# EAGLE board Theseus_PCB (EAGLE 9.7.0)
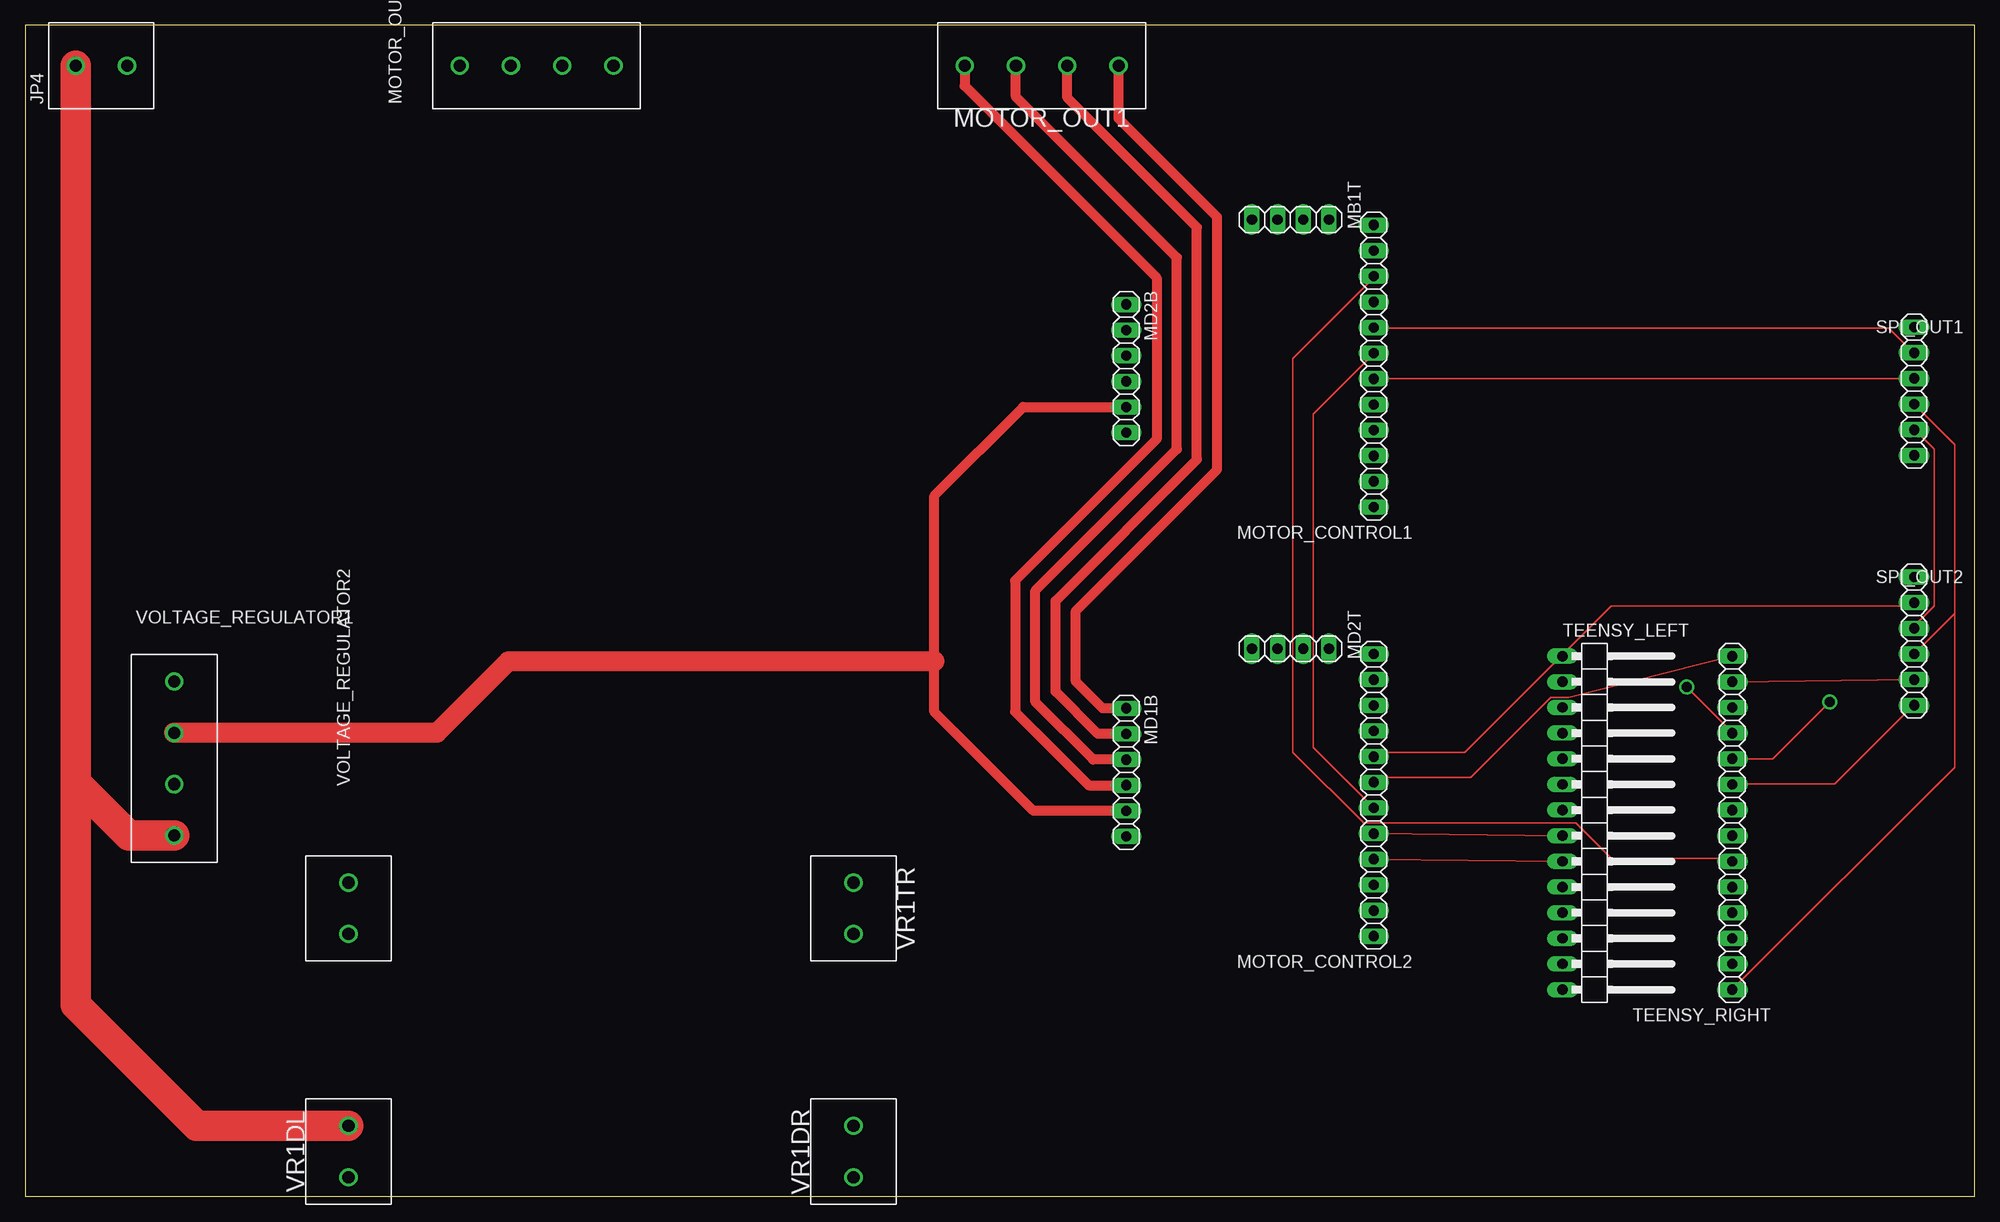
[diagram p0: board, top side]
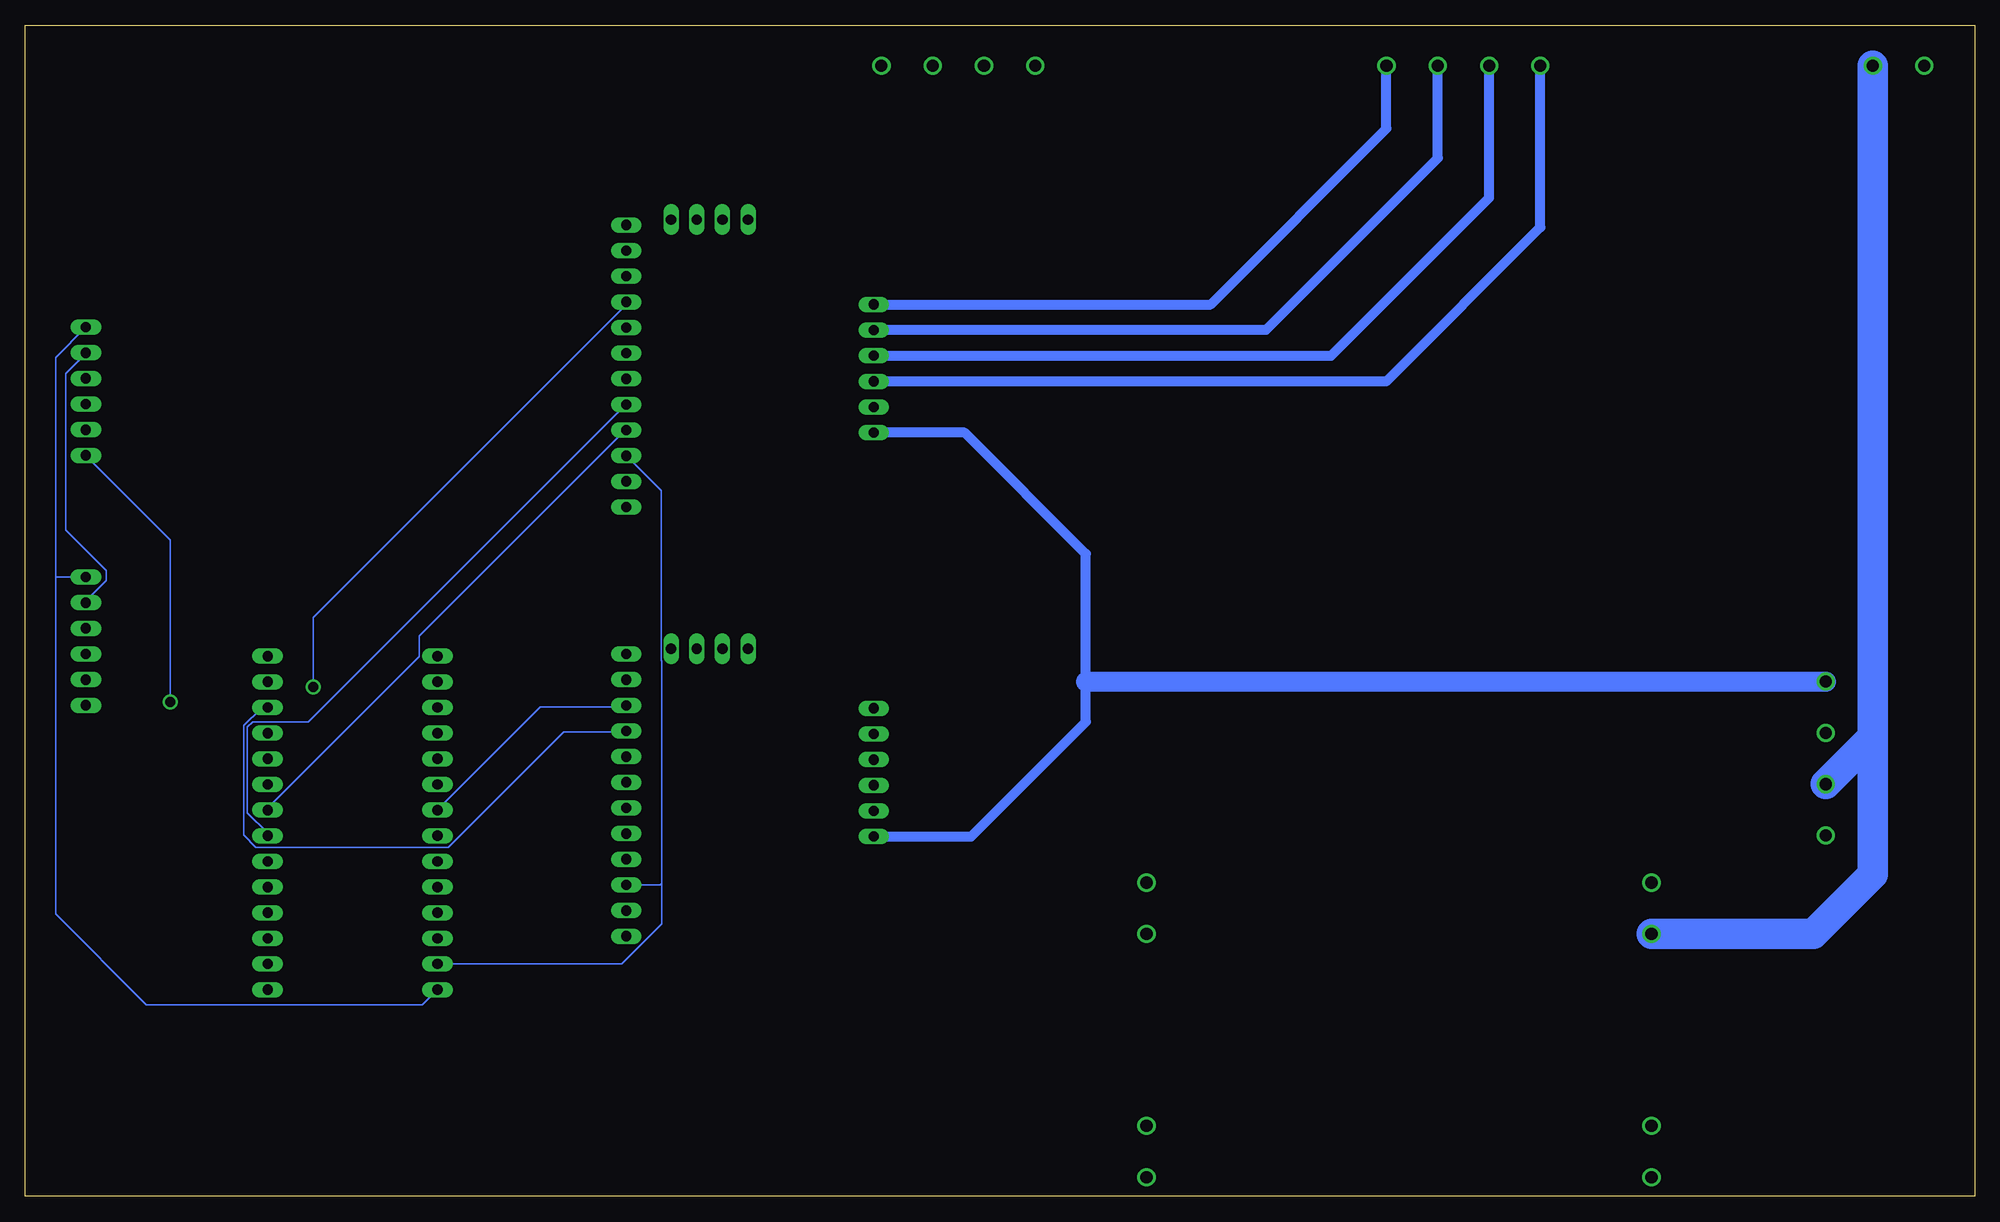
[diagram p1: board, bottom side, seen from below]

Size 193 x 116 mm. Coordinates in mm from the lower left corner, seen from the top.
Outline: 0,0 193,0 193,116 0,116 0,0
Copper layers (1*16): Top / Bottom
Stack-up Default Layer Stack: Top User Defined 0.035mm / Dielectric-1 User Defined 1.5mm / Bottom User Defined 0.035mm
Design rules: minimum copper width 6mil, minimum drill size 1mm, copper clearance wire_polygon to wire_polygon 6mil, copper clearance wire_polygon to pad_smd 6mil, copper clearance wire_polygon to via 6mil, copper clearance pad_smd to pad_smd 6mil, copper clearance pad_smd to via 6mil, copper clearance via to via 6mil, copper clearance smd to pad (same net) 6mil, copper clearance smd to via (same net) 6mil, copper clearance smd to smd (same net) 6mil, dimension clearance 40mil, restrict clearance 0mil, drill distance 6mil, keepout clearance 0mil

## Footprints (pad centres in the part's own frame; a part is rotated, then mirrored left to right if it is on the bottom)
TERMBLK_508-2N = drill 1.2: 1 0,0; 2 5.08,0
1X04 = drill 1.016 long: 1 -3.81,0; 2 -1.27,0; 3 1.27,0; 4 3.81,0
1X06 = drill 1.016 long: 1 -6.35,0; 2 -3.81,0; 3 -1.27,0; 4 1.27,0; 5 3.81,0; 6 6.35,0
1X12 = drill 1.016 long: 1 -13.97,0; 2 -11.43,0; 3 -8.89,0; 4 -6.35,0; 5 -3.81,0; 6 -1.27,0; 7 1.27,0; 8 3.81,0; 9 6.35,0; 10 8.89,0; 11 11.43,0; 12 13.97,0
TERMBLK_508-4N = drill 1.2: 1 0,0; 2 5.08,0; 3 10.16,0; 4 15.24,0
1X14/90 = drill 1.016 long: 1 -16.51,-3.81; 2 -13.97,-3.81; 3 -11.43,-3.81; 4 -8.89,-3.81; 5 -6.35,-3.81; 6 -3.81,-3.81; 7 -1.27,-3.81; 8 1.27,-3.81; 9 3.81,-3.81; 10 6.35,-3.81; 11 8.89,-3.81; 12 11.43,-3.81; 13 13.97,-3.81; 14 16.51,-3.81
1X14 = drill 1.016 long: 1 -16.51,0; 2 -13.97,0; 3 -11.43,0; 4 -8.89,0; 5 -6.35,0; 6 -3.81,0; 7 -1.27,0; 8 1.27,0; 9 3.81,0; 10 6.35,0; 11 8.89,0; 12 11.43,0; 13 13.97,0; 14 16.51,0

## Placement (x,y rotation side)
JP4  2828XX-2282837-2  [TERMBLK_508-2N]  5,112 0 top
MB1T  PINHD-1X4  [1X04]  125.25,96.75 180 top
MD1B  PINHD-1X6  [1X06]  109,42 270 top
MD2B  PINHD-1X6  [1X06]  109,82 270 top
MD2T  PINHD-1X4  [1X04]  125.25,54.25 180 top
MOTOR_CONTROL1  PINHD-1X12  [1X12]  133.5,82.25 90 top
MOTOR_CONTROL2  PINHD-1X12  [1X12]  133.5,39.75 90 top
MOTOR_OUT1  2828XX-4282837-4  [TERMBLK_508-4N]  93,112 0 top
MOTOR_OUT2  2828XX-4282837-4  [TERMBLK_508-4N]  43,112 0 top
SPI_OUT1  PINHD-1X4  [1X06]  187,79.75 270 top
SPI_OUT2  PINHD-1X4  [1X06]  187,55 270 top
TEENSY_LEFT  PINHD-1X14/90  [1X14/90]  156,37 270 top
TEENSY_RIGHT  PINHD-1X14  [1X14]  169,37 90 top
VOLTAGE_REGULATOR1  2828XX-4282837-4  [TERMBLK_508-4N]  14.75,51 270 top
VOLTAGE_REGULATOR2  2828XX-2282837-2  [TERMBLK_508-2N]  32,26 90 top
VR1DL  2828XX-2282837-2  [TERMBLK_508-2N]  32,7 270 top
VR1DR  2828XX-2282837-2  [TERMBLK_508-2N]  82,7 270 top
VR1TR  2828XX-2282837-2  [TERMBLK_508-2N]  82,26 90 top

## Library data of the parts
JP4 VOLTAGE_REGULATOR2 VR1DL VR1DR VR1TR = Connector; CATEGORY: Fixed Terminal Blocks; DESCRIPTION: Fixed Terminal Blocks 5.08MM PCB MOUNT 2P; MANUFACTURER: TE Connectivity AMP Connectors; MPN: 282837-2; OPERATING_TEMPERATURE: -40°C to +105°C; PART_STATUS: ACTIVE; PITCH: 0.200" (5.08mm); ROHS_COMPLIANCE: RoHS Compliant; SERIES: Buchanan; SUBCATEGORY: Terminal Blocks; TYPE: Through Hole; Screw - Rising Cage Clamp; Side wire entry, Horizontal with Board
MB1T MD2T = Connector; CATEGORY: Headers; DESCRIPTION: Header, Straight, 4 Position; MANUFACTURER: Generic; MPN: Generic; OPERATING_TEMPERATURE: Generic; PART_STATUS: Active; PITCH: 0.100" (2.54mm); ROHS_COMPLIANCE: Generic; SERIES: Generic; SUB-CATEGORY: Headers, Male Pins; TYPE: Board to Board or Cable, Unshrouded, Through Hole, Straight
MD1B MD2B SPI_OUT1 SPI_OUT2 = Connector; CATEGORY: Headers; DESCRIPTION: Header, Straight, 6 Position; MANUFACTURER: Generic; MPN: Generic; OPERATING_TEMPERATURE: Generic; PART_STATUS: Active; PITCH: 0.100" (2.54mm); ROHS_COMPLIANCE: Generic; SERIES: Generic; SUB-CATEGORY: Headers, Male Pins; TYPE: Board to Board or Cable, Unshrouded, Through Hole, Straight
MOTOR_CONTROL1 MOTOR_CONTROL2 = Connector; CATEGORY: Headers; DESCRIPTION: Header, Straight, 12 Position; MANUFACTURER: Generic; MPN: Generic; OPERATING_TEMPERATURE: Generic; PART_STATUS: Active; PITCH: 0.100" (2.54mm); ROHS_COMPLIANCE: Generic; SERIES: Generic; SUB-CATEGORY: Headers, Male Pins; TYPE: Board to Board or Cable, Unshrouded, Through Hole, Straight
MOTOR_OUT1 MOTOR_OUT2 VOLTAGE_REGULATOR1 = Connector; CATEGORY: Fixed Terminal Blocks; DESCRIPTION: Fixed Terminal Blocks 5.08MM PCB MOUNT 4P; MANUFACTURER: TE Connectivity AMP Connectors; MPN: 282837-4; OPERATING_TEMPERATURE: -40°C ~ 105°C; PART_STATUS: Active; PITCH: 0.200" (5.08mm); ROHS_COMPLIANCE: RoHS Compliant; SERIES: Buchanan; SUBCATEGORY: Terminal Blocks; TYPE: Through Hole; Screw - Rising Cage Clamp; Side wire entry, Horizontal with Board
TEENSY_LEFT = Connector; CATEGORY: Headers; DESCRIPTION: Header, Right Angle, 14 Position; MANUFACTURER: Generic; MPN: Generic; OPERATING_TEMPERATURE: Generic; PART_STATUS: Active; PITCH: 0.100" (2.54mm); ROHS_COMPLIANCE: Generic; SERIES: Generic; SUB-CATEGORY: Headers, Male Pins; TYPE: Board to Board or Cable, Unshrouded, Through Hole, Right Angle
TEENSY_RIGHT = Connector; CATEGORY: Headers; DESCRIPTION: Header, Straight, 14 Position; MANUFACTURER: Generic; MPN: Generic; OPERATING_TEMPERATURE: Generic; PART_STATUS: Active; PITCH: 0.100" (2.54mm); ROHS_COMPLIANCE: Generic; SERIES: Generic; SUB-CATEGORY: Headers, Male Pins; TYPE: Board to Board or Cable, Unshrouded, Through Hole, Straight

## Nets
MD2B: MD2B.4 MOTOR_OUT2.1
N$1: SPI_OUT1.5 SPI_OUT2.3
N$2: MOTOR_CONTROL1.10 TEENSY_RIGHT.6
N$3: JP4.1 VOLTAGE_REGULATOR1.4 VR1DL.1
N$4: JP4.2 VOLTAGE_REGULATOR1.3 VOLTAGE_REGULATOR2.1
N$5: MOTOR_CONTROL1.5 TEENSY_RIGHT.7
N$6: SPI_OUT2.6 TEENSY_RIGHT.9
N$7: MOTOR_CONTROL1.6 SPI_OUT1.3
N$8: MOTOR_CONTROL1.4 TEENSY_RIGHT.8
N$9: MOTOR_CONTROL2.10 TEENSY_LEFT.7
N$10: MOTOR_CONTROL1.7 MOTOR_CONTROL2.6
N$11: MOTOR_CONTROL1.8 MOTOR_CONTROL2.8 SPI_OUT1.2 SPI_OUT2.2 TEENSY_LEFT.1
N$12: MOTOR_CONTROL2.5 TEENSY_LEFT.8
N$13: MOTOR_CONTROL2.4 TEENSY_LEFT.9
N$14: MOTOR_CONTROL1.3 MOTOR_CONTROL2.3 TEENSY_LEFT.13
N$15: MD1B.5 MD2B.5 VOLTAGE_REGULATOR1.2
N$16: MD1B.6 MD2B.6 VOLTAGE_REGULATOR1.1
N$17: MOTOR_CONTROL2.7 TEENSY_RIGHT.14
N$18: MD2B.1 MOTOR_OUT2.4
N$19: MD2B.2 MOTOR_OUT2.3
N$20: MD2B.3 MOTOR_OUT2.2
N$21: SPI_OUT2.5 TEENSY_RIGHT.13
N$22: MD1B.1 MOTOR_OUT1.4
N$23: SPI_OUT1.4 SPI_OUT2.4 TEENSY_RIGHT.1
N$24: MD1B.3 MOTOR_OUT1.2
N$25: MD1B.4 MOTOR_OUT1.1
N$26: SPI_OUT1.1 SPI_OUT2.1 TEENSY_LEFT.14
N$27: SPI_OUT1.6 TEENSY_RIGHT.10
N$28: MOTOR_CONTROL1.9 TEENSY_RIGHT.11
N$29: MOTOR_CONTROL2.9 TEENSY_RIGHT.12
POWER_GROUND: MD1B.2 MOTOR_OUT1.3

## Tracks (layer width: path | path; a pad name or v marks a point on that pad's centre or on a via)
MD2B
  Bottom 1: MD2B.4 58.27,80.73 43,96 MOTOR_OUT2.1
N$1
  Top 0.152: SPI_OUT2.3 187,56.5 189,58.5 189,74 187,76 SPI_OUT1.5
N$2
  Top 0.152: TEENSY_RIGHT.6 169,33.5 157,33.5 153.5,37 132.5,37 125.5,44 125.5,83 133.5,91 MOTOR_CONTROL1.10
N$3
  Top 3: JP4.1 5,41 | 5,41 5,19 17,7 VR1DL.1 | VOLTAGE_REGULATOR1.4 10.24,35.76 5,41
N$4
  Bottom 3: JP4.2 10.08,45.51 | 10.08,45.51 VOLTAGE_REGULATOR1.3 | 10.08,45.51 10.08,31.92 16,26 VOLTAGE_REGULATOR2.1
N$5
  Bottom 0.152: TEENSY_RIGHT.7 169,36 171,38 171,46.5 170.5,47 165,47 133.5,78.5 MOTOR_CONTROL1.5
N$6
  Top 0.152: TEENSY_RIGHT.9 169.09,40.84 179.15,40.84 186.93,48.61 SPI_OUT2.6
N$7
  Top 0.152: SPI_OUT1.3 MOTOR_CONTROL1.6
N$8
  Bottom 0.152: TEENSY_RIGHT.8 169,38.5 154,53.5 154,55.5 133.5,76 MOTOR_CONTROL1.4
N$9
  Bottom 0.152: MOTOR_CONTROL2.10 133.5,48.5 142,48.5 152,38.5 TEENSY_LEFT.7
N$10
  Top 0.152: MOTOR_CONTROL2.6 133.5,38.5 127.51,44.49 127.51,77.51 133.5,83.5 MOTOR_CONTROL1.7
N$11
  Top 0.152: MOTOR_CONTROL1.8 133.5,86 184.5,86 187,83.5 SPI_OUT1.2 | MOTOR_CONTROL2.8 133.5,44 142.5,44 152,53.5 TEENSY_LEFT.1 152.5,54 157,58.5 187,58.5 SPI_OUT2.2
  Bottom 0.152: SPI_OUT1.2 187,83.5 189,81.5 189,66 185,62 185,61 187,59 SPI_OUT2.2
N$12
  Top 0.152: MOTOR_CONTROL2.5 TEENSY_LEFT.8
N$13
  Top 0.152: MOTOR_CONTROL2.4 TEENSY_LEFT.9
N$14
  Bottom 0.152: TEENSY_LEFT.13 133.97,23.03 130,27 130,31 | 130,31 130,53.03 130.05,53.08 130.05,69.91 MOTOR_CONTROL1.3 | MOTOR_CONTROL2.3 130.14,30.86 130,31
N$15
  Top 1: MD1B.5 99.81,38.19 90,48 90,53 90,69.41 98.78,78.19 MD2B.5
  Top 2: VOLTAGE_REGULATOR1.2 40.75,45.92 47.83,53 90,53
N$16
  Bottom 1: MD1B.6 99.35,35.65 88,47 88,51 88,63.65 100,75.65 MD2B.6
  Bottom 2: 88,51 VOLTAGE_REGULATOR1.1
N$17
  Top 0.152: MOTOR_CONTROL2.7 133.5,41.5 143.1,41.5 151.02,49.42 152.8,49.42 TEENSY_RIGHT.14
N$18
  Bottom 1: MD2B.1 75.65,88.35 58.24,105.76 MOTOR_OUT2.4
N$19
  Bottom 1: MD2B.2 70.19,85.81 53.16,102.84 MOTOR_OUT2.3
N$20
  Bottom 1: MD2B.3 63.73,83.27 48.08,98.92 MOTOR_OUT2.2
N$21
  Top 0.152: SPI_OUT2.5 TEENSY_RIGHT.13
N$22
  Top 1: MD1B.1 106.65,48.35 104,51 104,58 118,72 118,97 108.24,106.76 MOTOR_OUT1.4
N$23
  Top 0.152: SPI_OUT1.4 191,74.48 191,57.73 | 191,57.73 SPI_OUT2.4 | 191,57.73 191,42.5 TEENSY_RIGHT.1
N$24
  Top 1: MD1B.3 105.73,43.27 100,49 100,60 114,74 114,93 98.08,108.92 MOTOR_OUT1.2
N$25
  Top 1: MD1B.4 105.27,40.73 98,48 98,61 112,75 112,91 93,110 MOTOR_OUT1.1
N$26
  Bottom 0.152: TEENSY_LEFT.14 153.68,19 181,19 190,28 190,61.35 | 190,61.35 190,83.1 SPI_OUT1.1 | 190,61.35 SPI_OUT2.1
N$27  (via drill 1)
  Top 0.152: v178.65,48.98 173.01,43.35 TEENSY_RIGHT.10
  Bottom 0.152: v178.65,48.98 178.65,65.03 186.93,73.3 SPI_OUT1.6
N$28  (via drill 1)
  Top 0.152: v164.5,50.46 168.94,46.02 TEENSY_RIGHT.11
  Bottom 0.152: v164.5,50.46 164.5,57.32 133.59,88.24 133.59,88.54 MOTOR_CONTROL1.9
N$29
  Bottom 0.152: MOTOR_CONTROL2.9 133.59,46.02 139.68,46.02 151.11,34.59 170.16,34.59 171.38,35.81 171.38,46.63 169.71,48.31 169.09,48.31 TEENSY_RIGHT.12
POWER_GROUND
  Top 1: MD1B.2 106.19,45.81 102,50 102,59 116,73 116,96 103.16,108.84 MOTOR_OUT1.3